# Altium PCB TIDA_010057.PcbDoc (part 7 of 9)
Units mil, origin at the board's own origin, x right, y up, seen from the top; angles counter-clockwise.
Board outline 1771.65 x 3543.31 mil, 12 copper layers (Top Layer, GND1, Signal Layer 1, GND2, POWER1, POWER2, GND4, POWER3, GND6, Signal Layer 2, GND7, Bottom Layer), stack 62.79 mil thick; 593 components, 374 nets, 1805 pads, 1029 vias.
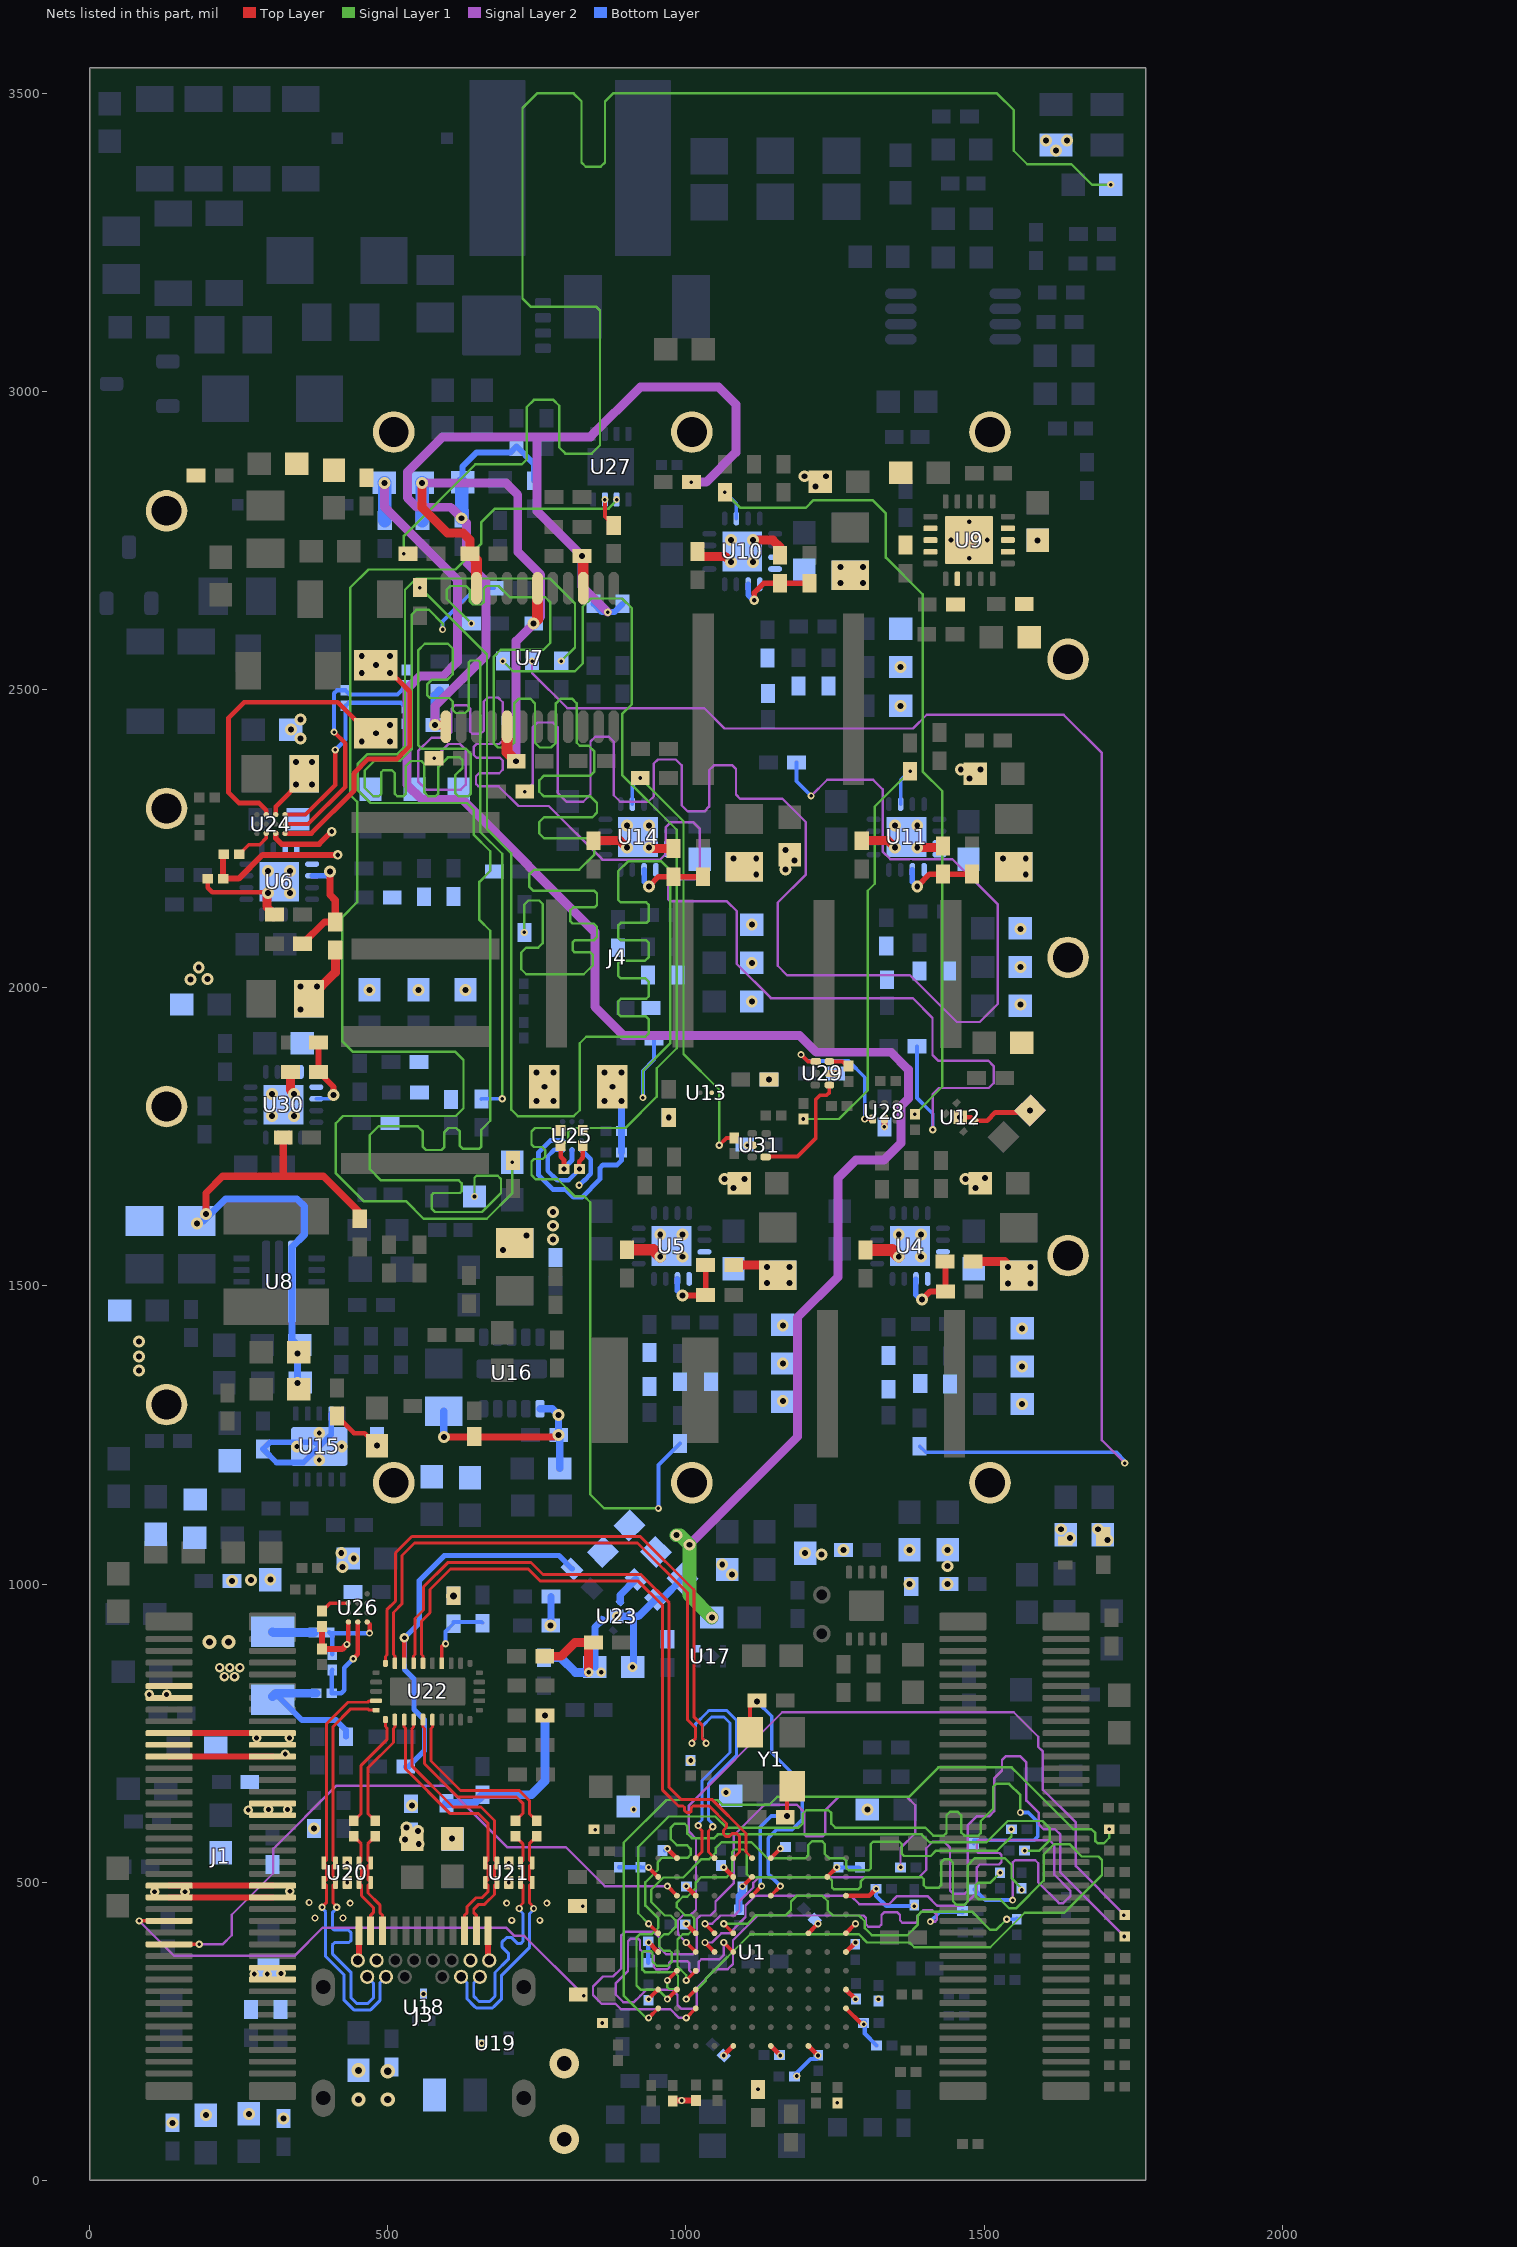
[diagram p15: the nets of this part, all layers, seen from the top]

## Via types
v1: diameter 12, hole 6, Top Layer to Bottom Layer, tented both sides, 424 vias
v2: diameter 20, hole 10, Top Layer to Bottom Layer, tented both sides, 401 vias
v3: diameter 16, hole 8, Top Layer to Bottom Layer, tented both sides, 96 vias
v4: diameter 24, hole 12, Top Layer to Bottom Layer, tented both sides, 28 vias
v5: diameter 20, hole 10, Top Layer to Bottom Layer, 28 vias
v6: diameter 40, hole 20, Top Layer to Bottom Layer, tented both sides, 23 vias
v7: diameter 19.68, hole 7.87, Top Layer to Bottom Layer, 17 vias
v8: diameter 19.68, hole 7.87, Top Layer to Bottom Layer, tented both sides, 10 vias
v9: diameter 32, hole 16, Top Layer to Bottom Layer, tented both sides, 1 vias
v10: diameter 13, hole 6, Top Layer to Bottom Layer, tented both sides, 1 vias

## Nets (pads, with @x,y where several pads share a name; then routed paths per layer and width w, separated by ;. In a path a pad name is that pad's centre, name@x,y a point inside that pad or via, vN(x,y) a via of type N, cw(c..) or ccw(c..) an arc to the next point about the centre after c; other vN are vias at no path point) (continued)
NetR220_1: R220.1 U1.J3 | length 1249.2
  Top Layer w6.25: v1(1000.5,272.5) U1.J3@1016.51,288.51
  Signal Layer 2 w4: v1(1000.5,272.5) 988.52,272.5 974.01,287 891.16,287 881.82,296.34 858.66,296.34 844.2,310.8 844.2,325.2 861,342 878,342 891.8,355.8 891.8,410.8 897.71,416.71 943.22,416.71 943.26,416.75 945.45,416.75 955.2,407 955.2,390.8 967,379 1011,379 1018,386 1018,438 1024.31,444.31 1041.31,444.31 1049.69,452.69 1049.69,467.72 1080,498.04 1080,578 1132.2,630.2 1185.8,630.2 1199,617 1199,580 1202,577 1229.15,577 1234,581.85 1234,621 1256,643 1370.82,643 1384.7,629.12 1384.7,582.19 1360.01,557.5 v1(1360.01,525)
NetR221_1: R221.1 U1.J1 | length 1288.3
  Top Layer w6.25: v1(937.5,272.5) U1.J1@953.52,288.51
  Signal Layer 1 w4: v1(937.5,272.5) 933.45,272.5 895.61,310.34 895.61,566.34 967.27,638 1053.17,638 1061.29,629.89 1139.89,629.89 1153.2,643.2 1373.95,643.2 1423.39,692.64 1546.2,692.64 1559,679.84 1649.84,589 1680.17,589 1686.8,582.37 1686.8,569.05 1690.36,565.5 1700.98,565.5 1710.01,574.53 v1(1710.01,589)
NetR222_1: R222.1 U1.H2 | length 1217.8
  Top Layer w6.25: v1(969,303.99) U1.H2@985.02,320.01
  Signal Layer 1 w4: v1(969,303.99) 952.99,320 924,320 917.16,326.84 917.16,407.16 923,413 943,413 953.8,423.8 953.8,439 932,460.8 932,499.98 953,520.98 953,534 960.3,541.3 1003.3,541.3 1008,546 1008,556 1002,562 985,562 974.8,572.2 974.8,591.8 981,598 998,598 1002.57,593.43 1002.57,581.43 1010,574 1047.5,574 1053.7,580.2 1395.3,580.2 1408.5,567 1504,567 1539.8,602.8 1598.2,602.8 1610,591 1610,570 1593,553 v1(1567.99,553)
NetR223_1: R223.1 U1.H3 | length 1221.7
  Top Layer w6.25: v1(1000.5,303.99) U1.H3@1016.51,320.01
  Signal Layer 1 w4: v1(1000.5,303.99) 1002.38,303.99 1033.6,335.21 1033.6,338.6 1107.82,412.82 1290.21,412.82 1304.01,399.02 1375.11,399.02 1383.13,391 1510.52,391 1568.32,448.8 1634.97,448.8 1640.83,454.66 1640.83,455.21 1697.82,512.2 1697.82,537.38 1692,543.2 1663.96,543.2 1643.16,564 1617.86,564 1599.93,546.07 1599.93,502.41 1553.72,456.2 1542.28,456.2 1527,471.48 1490.52,471.48 1486,476 1486,495 1490,499 1510.01,499 v1(1527,515.99)
NetR224_1: R224.1 U1.F4 | length 1226.3
  Top Layer w6.25: v1(1031.99,399.02) U1.F4@1048.01,383
  Signal Layer 2 w4: v1(1031.99,399.02) 1044.02,399.02 1049.69,404.69 ; 1049.69,404.73 1059.17,414.22 1072.7,414.22 1100,441.51 1100,461 1116.21,477.21 1276.79,477.21 1291,463 1340.49,463 1354.29,476.8 1405.12,476.8 1420.72,461.2 1421,461.2 1421.64,460.56 1465.56,460.56 1488,483 1488,525 1492.79,529.79 1525.04,529.79 1529.25,534 1529.25,545.75 1526,549 1491,549 1488,552 1488,568 1490.39,570.39 1609.61,570.39 1618,562 1618,512.52 1645,485.52 1645,477 1633,465 1625.52,465 1591,499.52 1591,532 1586,537 1552,537 1548,533 v1(1548,470)
  Bottom Layer w6.25: R224.1@1483.99,488 1501.91,470.08 1547.92,470.08 v1(1548,470)
NetR225_1: R225.1 U1.G2 | length 1212.3
  Top Layer w6.25: v1(969,335.49) U1.G2@985.02,351.5
  Signal Layer 1 w4: v1(969,335.49) 969,324 972,321 982,321 986.7,325.7 986.7,343.3 980.71,349.29 931.21,349.29 926.96,353.54 926.96,381.96 929,384 942,384 944,382 944,367 951,360 969.8,360 976.2,366.4 976.2,382 972.98,385.22 962.78,385.22 955.2,392.8 955.2,404.73 963.28,412.82 970.82,412.82 982.8,424.8 982.8,436.23 974.72,444.31 964.49,444.31 941.8,467 941.8,487.8 962,508 995.48,508 1026.28,538.8 1039.29,538.8 1050.2,549.71 1050.2,557.72 1059.68,567.2 1110,567.2 1137,540.2 1200.2,540.2 1205,545 1205,562 1212,569 1228,569 1233,564 1233,547.45 1240.25,540.2 1264.8,540.2 1269,536 1269,524 1273,520 1307,520 1310,523 1310,564 1314,568 1358,568 1362,564 1362,548 1366,544 1410.55,544 1419.55,553 1522.21,553 1546,576.79 v1(1546,589)
NetR226_1: R226.1 U1.G3 | length 1133.7
  Top Layer w6.25: v1(1000.5,335.49) U1.G3@1016.51,351.5
  Signal Layer 1 w4: v1(1000.5,335.49) 1000.5,343.97 986,358.46 986,404.04 994.78,412.82 1004,412.82 1014.3,423.11 1014.3,439.45 1009,444.75 998.24,444.75 985,457.99 985,466.03 994.78,475.81 1002.32,475.81 1016.79,490.28 1016.79,499.8 1025.7,508.7 1068.5,508.7 1077.8,518 1077.8,550.8 1082,555 1097,555 1102,550 1102,513.7 1107,508.7 1239.3,508.7 1245,503 1245,491.41 1248,488.41 1289.41,488.41 1293,492 1293,501 1300.7,508.7 1395.3,508.7 1399,505 1399,495 1403,491 1424,491 1428,495 1428,533 1433.75,538.75 1441.99,538.75 1448,532.74 1448,468 1454,462 1467,462 1473,468 1473,529 1484.3,540.3 1534.95,540.3 1546,529.25 1546,507.01 1563,490.01 v1(1563,487)
NetR227_1: R227.1 U1.F3 | length 1308.9
  Top Layer w6.25: v1(1000.5,399.02) U1.F3@1016.51,383
  Signal Layer 2 w4: v1(1000.5,399.02) 986.7,412.82 986.7,436.23 995.47,445 1008,445 1017,454 1017,573 1005,585 1005,628.54 1161.66,785.2 1549.8,785.2 1591,744 1591,727 1598.8,719.2 1598.8,655.2 1654,600 1654,526.99 1734,446.99 v1(1734,445)
NetR228_1: R228.1 U1.F5 | length 1220.8
  Top Layer w6.25: v1(1063.49,399.02) U1.F5@1079.5,383
  Signal Layer 2 w4: v1(1063.49,399.02) 1063.49,377.91 1056.38,370.8 1025.8,370.8 1021.8,366.8 1021.8,351.5 1018.05,347.75 1010.05,347.75 1005.8,352 1005.8,364.2 1002.2,367.8 974.5,367.8 972,365.3 972,357 969,354 950,354 946,358 946,376.75 939.39,383.36 927.16,383.36 923.05,387.47 923.05,402.32 919.86,405.51 907.48,405.51 903,401.03 903,351.16 882.62,330.78 882.62,311.38 895,299 913,299 923.7,309.7 934,320 977,320 986,311 986,294 992,288 1013,288 1018.19,293.19 1018.19,323.19 1049,354 1070,354 1079,363 1079,402.86 1120.45,444.31 1298,444.31 1302.13,440.19 1302.13,429 1305.71,425.42 1324.42,425.42 1328,429 1328,445 1333,450 1353.84,450 1359.04,444.8 1359.04,436.16 1363,432.2 1385.2,432.2 1388,435 1388,443 1398,453 1413,453 1421,445 1421,437 1418,434 v1(1410,434)
  Bottom Layer w6.25: v1(1410,434) 1425.86,449.86 1463.23,449.86 1464.01,449.08 R228.1@1464.01,452
NetR231_1: R231.1 U26.B1 | length 49.4
  Top Layer w6.25: R231.1@390,954.99 403.01,968 U26.B1@434,968
NetR234_2: R234.2 U29.6 | length 32.4
  Top Layer w6.25: U29.6@1240.62,1876.38 1262.62,1876.38 R234.2@1270,1869
NetR235_1: R235.1 U24.B1 | length 64.4
  Top Layer w6.25: R235.1@250.98,2224 266.98,2240 285.17,2240 296.25,2251.09 U24.B1@296.25,2259
NetR240_1: R240.1 U1.E1 | length 1227.1
  Top Layer w6.25: v1(937.5,430.51) U1.E1@953.52,414.5
  Signal Layer 1 w4: v1(937.5,430.51) 920,448.02 920,559 971.2,610.2 1049.3,610.2 1067.9,591.6 1188.81,591.6 1196,598.79 1196,615 1201.8,620.8 1239.2,620.8 1244,616 1244,598 1250.4,591.6 1401.37,591.6 1414.77,578.2 1432.37,578.2 1437.03,582.86 1437.03,612.26 1443.29,618.51 1455.57,618.51 1461.93,612.16 1461.93,583.26 1466.99,578.2 1490.2,578.2 1494.2,582.2 1494.2,602.2 1515.2,623.2 1515.2,660.2 1520,665 1542.16,665 1561,646.16 v1(1561,617)
  Bottom Layer w6.25: R240.1@1483,565.01 1483,570.39 1583.67,570.39 1590.17,576.9 1590.17,601.05 1574.22,617 v1(1561,617)
NetR243_1: R243.1 U1.E5 | length 632.4
  Top Layer w6.25: v1(1063.49,430.51) U1.E5@1079.5,414.5
  Signal Layer 1 w4: v1(1063.49,430.51) 1103.51,430.51 1117.8,444.8 1167.8,444.8 1176.21,453.21 1176.21,467.72 1185.69,477.21 1229,477.21 1238,468.21 1238,453 1246.69,444.31 1290.21,444.31 1300,434.52 1300,423 1312,411 1371.13,411 1389,428.87 1389,444.5 1395.25,450.75 1479.73,450.75 1510.38,420.1 1520.1,420.1 v1(1538,438)
  Bottom Layer w6.25: v1(1538,438) R243.1@1555,437.99 R243.1@1555,439.61
NetR244_1: R244.1 U1.E4 | length 1309.4
  Top Layer w6.25: v1(1031.99,430.51) U1.E4@1048.01,414.5
  Signal Layer 2 w4: v1(1031.99,430.51) 1043.97,430.51 1057.77,444.31 1081.31,444.31 1090,453 1090,468.47 1113.22,491.68 1113.22,499.22 1122.47,508.47 1390.96,508.47 1403,520.51 1403,557 1414,568 1433,568 1442.95,558.05 1442.95,486.05 1448,481 1468,481 1473,486 1473,596 1488,611 1509,611 1517,619 1517,674 1530.2,687.2 1530.2,705 1536.2,711 1561,711 1571,701 1571,637 1592,616 1592,597 1600,589 1619,589 1628,580 1628,516.38 v1(1735.38,409)
NetU28_4: U28.4 U29.1 | length 235.9
  Top Layer w6.25: v1(1193,1888) 1204.62,1876.38 U29.1@1217.98,1876.38 ; v1(1300,1780) U28.4@1313.31,1780
  Bottom Layer w6.25: v1(1193,1888) 1203.56,1877.44 1272.56,1877.44 1300,1850 v1(1300,1780)
NetU29_4: U29.4 U31.1 | length 202.1
  Top Layer w6.25: U31.1@1133.83,1716.31 1134.51,1717 1187,1717 1218,1748 1218,1813 1224.89,1819.89 1235.89,1819.89 1240.62,1824.62 U29.4@1240.62,1837.01
PGND: C41.2 C43.2 C44.2 C45.2 C46.2 C47.2 C48.2 C50.2 C51.2 C56.2 C57.2 C58.2 C61.2 C62.2 C63.2 C64.2 C66.2 C67.2 C68.2 C75.2 C76.2 C81.2 C82.2 C83.2 C84.2 C85.2 C86.2 C87.2 C88.2 C89.2 C90.2 C94.2 C95.1 C96.2 C97.2 C98.2 C99.2 C100.2 C101.2 C103.2 C104.2 C105.2 C106.2 C107.2 C108.2 C109.2 C110.2 C111.2 C113.2 C114.2 C117.2 C118.2 C120.2 C121.2 C122.2 C124.1 C129.2 C131.2 C132.2 C134.2 C135.2 C137.2 C155.2 C157.2 C158.2 C159.2 C160.2 C161.1 C171.2 C175.2 C178.2 C181.2 C186.2 C187.2 C189.2 C191.2 C192.1 C193.2 C194.1 C195.1 C196.2 C197.2 C198.2 C199.2 C202.1 C203.2 C207.2 C209.2 C210.2 C215.2 C216.2 C217.2 C218.2 C219.2 C220.2 C221.2 C222.2 C223.2 C224.2 C225.2 C226.2 C227.2 C228.2 C229.2 C230.2 C231.2 C244.1 D7.1 D10.2 D11.2 D12.2 D13.2 D14.2 D15.2 D16.2 GND.1 J3.A1 J3.A12 J3.B1 J3.B12 J3.M1 J3.M2 J4.SH1 J4.SH2 J4.SH3 J4.SH4 J4.SH5 J4.SH6 J4.SH7 J4.SH8 J4.SH9 J4.SH10 J4.SH11 J4.SH12 J4.SH13 L21.2 L29.2 L38.1 L39.1 L44.2 R51.1 R58.1 R60.2 R61.2 R76.1 R98.1 R100.2 R105.1 R106.2 R111.1 R115.1 R116.2 R119.2 R126.1 R131.1 R132.2 R137.2 R165.1 R190.2 U4.3 U4.4 U4.5 U4.17 U5.3 U5.4 U5.5 U5.17 U6.3 U6.4 U6.5 U6.17 U8.6@339.32,1507 U9.2 U9.3 U9.4 U9.12 U9.13 U9.14 U9.17 U9.21 U10.3 U10.4 U10.5 U10.17 U11.3 U11.4 U11.5 U11.17 U12.2 U12.5 U13.B2 U14.3 U14.4 U14.5 U14.17 U15.4 U15.11 U16.6 U18.3 U19.3 U20.3@432,532.44 U20.8@432,499.56 U21.3@703,532.44 U21.8@703,499.56 U23.2 U23.5 U24.C1 U24.C3 U30.3 U30.4 U30.5 U30.17 | length 3228.5
  Top Layer w8: C155.2@198,2183 198,2168 205.5,2160.5 v5@297.5,2160.5 ; U24.C3@312,2290.5 312,2304 360,2352 C62.2@360,2359 ; C192.1@415,1281.76 443,1253.76 443,1253 461.38,1253 v2(482,1232.38) ; v2(1460,1783) 1478.1,1783 U12.2@1483.94,1777.15 1505.15,1777.15 1518.99,1790.99 1573.99,1790.99 v2(1577.27,1794.27)
  Top Layer w9: U24.C1@312,2259 312,2251 322,2241 385,2241 v3(406,2262)
  Top Layer w10: J3.B12@449.76,368.93 451.73,370.9 J3.A1@451.73,418.54 ; J3.A12@668.27,418.54 668.27,370.9 J3.B1@670.24,368.93
  Top Layer w12: v2(195,1621) 195,1656 223,1684 324,1684 ; C160.2@324.76,1749 324.76,1684.76 324,1684 ; R165.1@453,1612.62 453,1623 392,1684 324,1684 ; v2(594,1247) 783.62,1247 v2(786.62,1250)
  Top Layer w15: v5@297.5,2160.5 297.5,2135.5 C66.2@310,2123 ; R131.1@336.76,1859 336.76,1828.24 v5(343,1822) ; C157.2@368,1982 412,2026 R76.1@412,2063.38 ; C216.2@845,2246.74 889.26,2246.74 v5(901,2235) ; v5(938,2235) 939.38,2233.62 R115.1@979,2233.62 ; C87.2@1019.5,2731.62 1019.5,2723.5 1066.01,2723.5 v5(1075.5,2714) ; R58.1@1080.24,1535 1137,1535 C57.2@1154,1518 ; v5(1112.5,2751) 1146,2751 1158,2739 R98.1@1158,2725.62 ; C106.2@1295,2246.74 1339.26,2246.74 v5(1351,2235) ; v5(1388,2235) 1428,2235 R105.1@1431,2238 ; R51.1@1481.62,1541 1534.5,1541 C43.2@1558,1517.5
  Top Layer w20: C157.2@368,1982 C157.2@373.5,1976.5 ; C94.2@901,1560.74 945.26,1560.74 v5(957,1549) ; C45.2@1301,1560.24 1345.76,1560.24 v5(1357,1549)
  Bottom Layer w9.5: C122.2@291,1226.38 302.62,1238 378.2,1238 U15.11@385.32,1230.88 ; 335,1204 358.43,1204 U15.11@385.32,1230.88 ; U15.4@405,1286 405,1250.57 U15.11@385.32,1230.88
  Bottom Layer w10: C122.2@291,1226.38 313.38,1204 335,1204
  Bottom Layer w12: C117.2@191,1609 228,1646 348,1646 360,1634 360,1586 339.32,1565.32 U8.6@339.32,1507 339.32,1410.17 348.5,1401 v2(348.5,1387) v2(348.5,1337) ; v2(594,1247) C194.1@594,1290 ; U16.6@755.24,1294.07 775.93,1294.07 v2(786.62,1283.38) v2(786.62,1250) 788.5,1248.13 R190.2@788.5,1194 ; v3(884,946) 902.1,946 ; 904.44,948.35 902.1,946 ; v3(910.5,861) 911.87,862.38 911.87,940.91 906.79,946 ; C203.2@994.27,1009.29 959.58,974.59 C202.1@949.41,974.59 920.81,946 906.79,946 ; 902.1,946 906.79,946
  other v1: 657.36,230 560,312.64 708.06,436 755.06,436 378,440 425,440 436.8,465 699.24,465 766.86,465 368,466 432,499.56 703,499.56 432,532.44 703,532.44
  other v2: 139,96.62 325,103.62 195,109.5 267,111.5 608,573 541,628.62 1564,1302 1162.5,1307 1564,1365 1162.5,1370 1564,1429 1162.5,1434 1136,1505 1174,1505 1540,1504.5 1578,1504.5 1136,1532 1174,1532 1540,1531.5 1578,1531.5 693,1560 733,1585 180,1605 971.26,1782.76 1139.26,1846 354,1964 1561,1972 1110.5,1977 469.53,1996.66 551.42,1996.66 630.53,1996.66 354,2002 381,2002 1561,2035 1110.5,2042 1561,2099 1110.5,2106 1118,2190 1570,2190 1080,2217 1118,2217 1532,2217 1570,2217 346,2341 373,2341 346,2379 373,2379 1360,2473 1360,2538 1259.01,2679 1297.01,2679 1259.01,2706 1297.01,2706 1590,2750.5
  other v4: 451,135.5 500,135.5 500,183 451,184.5
  other v5: 994,1549 1394,1549 957,1586 994,1586 1357,1586 1394,1586 306,1785 343,1785 306,1822 299,2159 336,2159 299,2196 336,2196 901,2272 938,2272 1351,2272 1388,2272 1112.5,2714 1075.5,2751
  other v7: 385.32,1208.24 347.91,1230.88 422.72,1230.88 385.32,1253.52
  other v8: 1475,2720.49 1444.49,2751 1505.51,2751 1475,2781.51
PORT: R153.1 R176.1 U22.4 | length 127.7
  Top Layer w6.25: U22.4@590.62,867.24 590.62,895.62 595,900 v1(597,900)
  Bottom Layer w6.25: v1(597,900) 597,920.38 R153.1@610,933.38 610,936.38 657.75,936.38 R176.1@658.87,935.25
RX_PG_1V2: R102.1 R108.2 U14.14 | length 750.1
  Top Layer w6.25: v1(1056,1736) 1067.98,1747.98 R102.1@1081,1747.98
  Signal Layer 1 w4: v1(923.42,2351.93) 996,2279.35 996,1889 1056,1829 v1(1056,1736)
  Bottom Layer w6.25: U14.14@910.16,2308.12 910.16,2338.67 v1(923.42,2351.93)
RX_PG_1V8: R91.2 R175.1 U10.14 | length 1413
  Signal Layer 1 w4: v1(1065.5,2831) 1091.5,2805 1201,2805 1214,2818 1313,2818 1335.5,2795.5 1335.5,2721.5 1397,2660 1397,2363 1430,2330 1430,1833.99 v1(1384,1787.99)
  Bottom Layer w6.25: v1(1065.5,2831) 1084.66,2811.83 U10.14@1084.66,2787.12
RX_PG_3V3: R62.2 R187.1 U11.14 | length 754.5
  Signal Layer 1 w4: v1(1197,1780.02) 1257.02,1780.02 1305,1828 1305,2162.91 1316.65,2174.56 1316.65,2304.03 v1(1376,2363.38)
  Bottom Layer w6.25: U11.14@1360.16,2308.12 1360.16,2347.54 v1(1376,2363.38)
SSRX1_N: J3.B10 U20.5 U20.6 U22.14 | length 705.3
  Top Layer w5: v1(390,458) 390,458.44 396.97,465.41 396.97,495.22 U20.6@392.63,499.56 396.97,503.91 396.97,528.09 U20.5@392.63,532.44 396.97,536.78 396.97,765.53 433.32,801.88 466.46,801.88 468.21,803.63 479.76,803.63 U22.14@480.39,804.25
  Bottom Layer w5: v1(390,458) 390,456.44 396,450.44 396,375.56 427,344.56 427,302 443,286 471.32,286 486.76,301.44 486.76,331.12 J3.B10@497.01,341.37
SSRX1_P: J3.B11 U20.4 U20.7 U22.15 | length 705.2
  Top Layer w5: v1@414.44,456 v1(414.44,458) 414.44,459.53 408.37,465.6 407.97,466.01 407.97,495.22 U20.7@412.32,499.56 407.97,503.91 407.97,528.09 U20.4@412.32,532.44 407.97,536.78 407.97,760.97 437.88,790.88 466.46,790.88 468.84,788.5 U22.15@480.39,788.5
  Bottom Layer w5: v1@414.44,456 414,456 407,449 407,423 410.37,419.63 434.37,419.63 438,416 438,401.83 435.17,399 411,399 407,395 407,380.11 438,349.11 438,306.56 447.56,297 466.76,297 475.76,306 475.76,331.12 J3.B11@465.51,341.37
SSRX2_N: J3.A10 U21.5 U21.6 U22.18 | length 469.1
  Top Layer w5: U22.18@527.63,772.76 527.63,760.41 530,758.04 530,690 605,615 652,615 667.97,599.03 667.97,536.78 U21.5@663.63,532.44 667.97,528.09 667.97,503.91 U21.6@663.63,499.56 667.97,495.22 667.97,483.97 658,474 648,474 633.24,459.24 633.24,449 628.9,444.66 J3.A10@628.9,418.54
SSRX2_P: J3.A11 U21.4 U21.7 U22.19 | length 469.1
  Top Layer w5: U22.19@543.38,772.76 543.38,760.41 541,758.04 541,694.55 609.56,626 656.56,626 678.97,603.58 678.97,536.78 U21.4@683.32,532.44 678.97,528.09 678.97,503.91 U21.7@683.32,499.56 678.97,495.22 678.97,479.42 664.56,465 662.56,463 652.56,463 644.24,454.68 644.24,449 648.58,444.66 J3.A11@648.58,418.54
SSRXM: U1.A3 U22.10 | length 1350.6
  Top Layer w5: U22.10@496.13,867.24 496.13,878.79 498.51,881.17 498.51,956.96 513,971.45 513,1052.56 540.44,1080 923.56,1080 1011,992.56 1014,989.56 1014,776.56 1027.44,763.12 1027.44,741.54 1033.88,735.1 v1(1033.88,733) ; U1.A3@1016.51,540.48 1026.76,550.73 1026.76,586.78 1020.64,592.9 v1(1020.64,595)
  Bottom Layer w5: v1(1020.64,595) 1020.64,597.95 1027,604.31 1027,670.56 1074,717.56 1074,767 1064,777 1043,777 1027.44,761.44 1027.44,741.54 1033.88,735.1 v1(1033.88,733)
SSRXP: U1.A4 U22.9 | length 1351.5
  Top Layer w5: U22.9@511.88,867.24 511.88,879.59 509.51,881.96 509.51,952.41 524,966.9 524,1048 545,1069 919,1069 1003,985 1003,772 1016.44,758.56 1016.44,741.54 1010,735.1 v1(1010,733) ; v1(1045,593) 1044.63,593 1037.76,586.13 1037.76,550.73 U1.A4@1048.01,540.48
  Bottom Layer w5: v1(1010,733) 1010,735.1 1016.44,741.54 1016.44,766 1035.22,784.78 1038.44,788 1068.56,788 1071.78,784.78 1085,771.56 1085,713 1038,666 1038,604.64 1045,597.64 v1(1045,593)
SSTX1_N: C125.1 J3.A3 U20.1 U20.10 | length 181
  Top Layer w5: C125.1@479,577 466.5,564.5 466.5,537.31 U20.1@471.37,532.44 467.03,528.09 467.03,503.91 U20.10@471.37,499.56 467.03,495.22 467.03,481.97 486.76,462.24 486.76,449 491.1,444.66 J3.A3@491.1,418.54
SSTX1_N_SYS: C127.2 U22.16 | length 193.7
  Top Layer w5: C127.2@443,602.98 455.5,615.48 455.5,696.06 498.51,739.06 498.51,758.83 496.13,761.21 U22.16@496.13,772.76
SSTX1_P: C127.1 J3.A2 U20.2 U20.9 | length 195
  Top Layer w5: C127.1@443,577 455.5,564.5 455.5,536.25 U20.2@451.69,532.44 456.03,528.09 456.03,503.91 U20.9@451.69,499.56 456.03,495.22 456.03,477.42 ; 466.22,467.22 456.03,477.42 ; J3.A2@471.42,418.54 471.42,444.66 475.76,449 475.76,457.68 456.03,477.42
SSTX1_P_SYS: C125.2 U22.17 | length 193.7
  Top Layer w5: C125.2@479,602.98 466.5,615.48 466.5,691.5 509.51,734.51 509.51,758.04 511.88,760.41 U22.17@511.88,772.76
SSTX2_N: C126.2 J3.B3 U21.1 U21.10 | length 421.9
  Top Layer w5: v1(744.5,456) 744.5,458.53 738.03,465 738.03,495.22 U21.10@742.37,499.56 738.03,503.91 738.03,528.09 U21.1@742.37,532.44 737.5,537.31 737.5,564.5 C126.2@750,577
  Bottom Layer w5: J3.B3@622.99,341.37 633.24,331.12 633.24,304.2 645.22,292.22 648.44,289 675.56,289 678.78,292.22 691,304.44 691,344.15 738,391.15 738,447.52 744.5,454.02 v1(744.5,456)
SSTX2_N_SYS: C128.1 U22.20 | length 302
  Top Layer w5: U22.20@559.13,772.76 559.13,760.41 561.5,758.04 561.5,698.94 617.44,643 716,643 726.5,632.5 726.5,615.48 C128.1@714,602.98
SSTX2_P: C128.2 J3.B2 U21.2 U21.9 | length 422.3
  Top Layer w5: C128.2@714,577 726.5,564.5 726.5,536.25 U21.2@722.69,532.44 727.03,528.09 727.03,503.91 U21.9@722.69,499.56 727.03,495.22 ; v1(720.5,456) 720.5,458.47 727.03,465 727.03,495.22 ; U21.9@726.5,494.69 727.03,495.22
  Bottom Layer w5: J3.B2@654.49,341.37 644.24,331.12 644.24,308.76 653,300 671,300 680,309 680,348.71 702.14,370.86 702.14,381.04 692,391.18 692,400 699,407 708,407 718,397 723,397 727,401 727,447.52 720.5,454.02 v1(720.5,456)
SSTX2_P_SYS: C126.1 U22.21 | length 302
  Top Layer w5: U22.21@574.87,772.76 574.87,760.41 572.5,758.04 572.5,703.5 622,654 720.56,654 721.56,653 737.5,637.06 737.5,615.48 C126.1@750,602.98
SSTXM: U1.A6 U22.7 | length 1108.6
  Top Layer w5: U22.7@543.38,867.24 543.38,879.59 545.75,881.96 545.75,942.31 560,956.56 560,995.56 600.44,1036 ; U1.A6@1111,540.48 1100.75,550.73 1100.75,581.8 1043.56,639 992,639 972,659 972,968.56 927.78,1012.78 924.56,1016 760.56,1016 740.18,1036.37 600.82,1036.37 ; 600.44,1036 600.82,1036.37 ; 600.44,1036 600.82,1036.37
SSTXP: U1.A5 U22.6 | length 1109.2
  Top Layer w5: U22.6@559.13,867.24 559.13,879.59 556.75,881.96 556.75,937.75 571,952 571,991 605.37,1025.37 735.63,1025.37 756,1005 920,1005 961,964 961,654.44 987.44,628 995,628 998,625 998,620 1001,617 1007,617 1009,619 1009,625 1012,628 1039,628 1068.3,598.7 1068.3,592.3 1063,587 1063,581 1067,577 1073,577 1078,582 1085,582 1089.75,577.25 1089.75,550.73 U1.A5@1079.5,540.48
SYNC_1V2_FX3: C239.1 R88.1 | length 2615
  Signal Layer 2 w4: v1(742,2548) 742,2528.26 801.06,2469.2 1030.8,2469.2 1065,2435 1381,2435 1404,2458 1633.53,2458 1697.66,2393.87 1697.66,1241.34 v1(1736,1203)
  Bottom Layer w6.25: C239.1@1392,1231.38 1402.38,1221 1722,1221 1736,1207 v1(1736,1203)
SYNC_1V2_RX: C238.1 R82.1 | length 2498.4
  Signal Layer 1 w4: v1(554,2671.24) 666.4,2558.84 666.4,2266.28 707.2,2225.48 707.2,1795.8 718.15,1784.85 812,1784.85 822,1794.85 822,1907 832.96,1917.96 931.96,1917.96 938,1924 938,1947 932.38,1952.62 890.43,1952.62 886.4,1956.64 886.4,1977.04 891,1981.64 933.64,1981.64 938,1986 938,2010 931.7,2016.3 890.43,2016.3 886.4,2020.32 886.4,2040.72 891,2045.32 931.32,2045.32 938,2052 938,2075 933.03,2079.97 890.43,2079.97 886.4,2084 886.4,2104.4 891,2109 934,2109 938,2113 938,2139 933.35,2143.65 890.43,2143.65 886.4,2147.68 886.4,2195.4 903,2212 959,2212 973.6,2197.4 973.6,1906.6 928,1861 v1(928,1816)
  Bottom Layer w6.25: v1(928,1816) 928,1861 946.62,1879.62 C238.1@946.62,1915
SYNC_1V8_FX3: C240.1 R87.1 | length 2452.9
  Signal Layer 1 w4: v1(693,2548) 710,2531 814,2531 827,2544 827,2639 841,2653 893,2653 909.2,2636.8 909.2,2475.2 893,2459 893,2357 984.8,2265.2 984.8,1898.8 951.06,1865.06 951.06,1817.56 898.5,1765 808,1765 803,1760 803,1744 799,1740 782,1740 778,1744 778,1761.25 774.25,1765 747,1765 741,1759 741,1737 745,1733 759,1733 764,1728 764,1717 760,1713 745,1713 741,1709 741,1686 748,1679 785,1679 813.2,1650.8 829.2,1650.8 839.6,1640.4 839.6,1150.4 863,1127 v1(954,1127)
  Bottom Layer w6.25: v1(954,1127) 954,1199.76 C240.1@990,1235.76
SYNC_1V8_RX: C69.1 R84.1 | length 2544.9
  Signal Layer 2 w4: v1(729.62,2329) 743.42,2342.8 743.42,2437.25 751.17,2445 777,2445 785,2437 785,2327 800,2312 828,2312 840,2324 840,2413 848,2421 871,2421 879,2413 879,2323 890,2312 937,2312 946,2321 946,2376 953,2383 983,2383 993,2373 993,2306 1003,2296 1031,2296 1039,2304 1039,2365 1047,2373 1078,2373 1084,2367 1084,2324 1091,2317 1162,2317 1201.2,2277.8 1201.2,2190.2 1154,2143 1154,2037 1169.8,2021.2 1375.8,2021.2 1454.27,1942.73 1492.73,1942.73 1523.21,1973.21 1523.21,2139.79 1447.2,2215.8 1380.05,2215.8 1379.85,2216 1375,2216 1374.8,2215.8 1343.05,2215.8 1330,2228.85 1330,2333 1314,2349 1237,2349 v1(1210,2322)
  Bottom Layer w6.25: C69.1@1185.62,2378 1185.62,2346.38 v1(1210,2322)
SYNC_3V3_RX: C237.1 R83.1 | length 2570.4
  Signal Layer 2 w4: v1(577.76,2385) 601.76,2409 621,2409 630.5,2399.5 630.5,2340.5 622.2,2332.2 564.8,2332.2 551,2346 551,2397 573.31,2419.31 597.31,2419.31 607,2429 607,2468 613,2474 633,2474 638.42,2468.58 638.42,2429.58 642,2426 656,2426 661,2431 661,2480 668,2487 685,2487 693,2479 693,2415 687,2409 649,2409 644,2404 644,2391 649,2386 688,2386 693,2381 693,2366 687,2360 653,2360 648,2355 648,2342 652,2338 686,2338 719,2305 770,2305 860,2215 957,2215 966,2224 966,2269 975,2278 1012,2278 1023,2267 1023,2190 1015,2182 976,2182 970,2176 970,2149 974,2145 1069,2145 1085.17,2128.83 1085.17,2040.17 1142.54,1982.8 1380.36,1982.8 1413.58,1949.58 1413.58,1887.42 1423,1878 1507,1878 1516,1869 1516,1840 1508,1832 1424,1832 1414,1822 v1(1414,1762)
  Bottom Layer w6.25: C237.1@1387.62,1902 1387.62,1815.34 1414,1788.96 v1(1414,1762)
SYNC_5V_TX: C243.2 R89.1 | length 2450.3
  Signal Layer 1 w4: v1(645.5,1650) 645.5,1681.5 648.8,1684.8 684.43,1684.8 690,1679.23 690,1656 658.08,1624.08 579,1624.08 574,1629.08 574,1653 577,1656 621,1656 624,1659 624,1672 619,1677 488.85,1677 469.8,1696.05 469.8,1753.2 484.6,1768 550,1768 559,1759 559,1733 564,1728 590,1728 595,1733 595,1758 602,1765 615,1765 621,1759 621,1735 626,1730 653,1730 657,1734 657,1762 672,1777 672,2095.7 653.73,2113.97 653.73,2177.78 672,2196.04 672,2229 644,2257 644,2299 633,2310 471,2310 450,2331 450,2376 466,2392 516,2392 529,2405 529,2667.74 547.7,2686.44 772.08,2686.44 814,2644.53 814,2571 v1(791,2548)
SYNC_-5V_TX: C206.2 R120.1 U27.6 | length 2308.5
  Signal Layer 1 w4: v1(709,1707.5) 709,1655.88 666,1612.88 560.12,1612.88 530.58,1642.42 459.42,1642.42 413,1688.84 413,1773 425,1785 614,1785 627,1798 627,1879 613,1893 441,1893 424,1910 424,2119 448.8,2143.8 448.8,2311.8 437.22,2323.38 437.22,2671.22 467.6,2701.6 613.6,2701.6 657,2745 657,2781 679.68,2803.68 870.45,2803.68 883.84,2817.07 v1(883.84,2818.88)
SYNC_FPGA_1V: C65.1 R86.1 | length 2516.6
  Signal Layer 1 w4: v1(592,2601) 592,2611 569,2634 548,2634 540.2,2626.2 540.2,2400.36 520.64,2380.8 478,2380.8 461.2,2364 461.2,2335.64 475.64,2321.2 485,2321.2 489,2325.2 489,2361.52 492.48,2365 507,2365 512,2360 512,2325.2 516,2321.2 526.2,2321.2 530,2325 530,2371.61 538.85,2380.46 556.35,2380.46 561,2375.81 561,2328.2 568,2321.2 580,2321.2 585,2326.2 585,2370.54 600.88,2386.42 620.79,2386.42 625.28,2381.93 625.28,2368.87 613,2356.59 613,2327 618.8,2321.2 635.2,2321.2 639,2325 639,2393 631,2401 557,2401 551,2407 551,2566 562,2577 601,2577 609,2569 609,2526 600,2517 574,2517 566,2509 566,2491 571,2486 603,2486 609,2480 609,2466 614,2461 630,2461 636,2467 636,2546 639,2549 652,2549 655.2,2545.8 655.2,2261.64 692,2224.84 v1(692,1814)
  Bottom Layer w6.25: v1(592,2601) 592,2614.41 647.74,2670.14 R86.1@678.34,2670.14 ; C65.1@657,1813.62 657.38,1814 v1(692,1814)
SYNC_FPGA_2V5: C60.1 R85.1 | length 2491.9
  Signal Layer 1 w4: v1(640.38,2611) 599,2652.38 599,2668 605,2674 631.15,2674 637.22,2667.94 637.22,2648.87 643.15,2642.93 656.89,2642.93 660.79,2646.83 660.79,2669.24 665.55,2674 686,2674 705.06,2654.94 764.06,2654.94 772.8,2646.2 772.8,2578.8 761,2567 689.6,2567 677.6,2555 677.6,2410.4 685,2403 704,2403 712,2411 712,2477 720,2485 739,2485 747,2477 747,2411 755,2403 774,2403 782,2411 782,2477 790,2485 809,2485 817,2477 817,2411 822,2406 837,2406 846,2397 846,2362 840,2356 762.01,2356 754.01,2348 754.01,2329 762.01,2321 840,2321 ; v1(729,2093) 729,2139.86 735.61,2146.47 754.01,2146.47 760,2140.49 760,2075 752.41,2067.41 732.24,2067.41 723.92,2059.09 723.92,2031.23 732.34,2022.8 828.8,2022.8 844,2038 844,2055 839,2060 813,2060 810,2063 810,2076 814,2080 846,2080 851,2085 851,2102.5 845.5,2108 810,2108 806,2112 806,2130 811,2135 847,2135 851,2139 851,2158 846,2163 743.77,2163 737.07,2169.7 737.07,2189.85 745.22,2198 821,2198 846,2223 846,2245 840,2251 762.01,2251 754.01,2259 754.01,2278 762.01,2286 843.19,2286 851.01,2293.82 851.01,2309.99 840,2321 ; 846,2315 840,2321
SYNC_HV_TX: C28.1 R160.1 | length 2595.1
  Signal Layer 1 w4: v1(527,2728) 527,2758 647,2878 725,2878 733,2886 733,2974 745,2986 778,2986 787.65,2976.35 787.65,2906.35 798,2896 842,2896 856,2910 856,3136 850,3142 740,3142 726,3156 726,3475.7 750.43,3500.13 811.74,3500.13 824.9,3486.97 824.9,3384.33 832.17,3377.06 857.04,3377.06 864.39,3384.41 864.39,3486.71 877.81,3500.13 1521.71,3500.13 1549.81,3472.03 1549.81,3403.82 1572.44,3381.2 1646.8,3381.2 1681,3347 v1(1712.5,3347)
SYNC_INPUT: R80.2 U27.7 | length 49.4
  Top Layer w6.25: v1(864.16,2818.88) 864.16,2790.46 R80.2@879,2775.62
TX_5V: C180.2 J1.57 J1.58 J1.59 J1.60 J1.61 J1.62 L28.2 | length 346.5
  Top Layer w10: J1.57@133.37,710.86 J1.58@306.6,710.86 ; J1.61@133.37,750.23 J1.62@306.6,750.23
  other v2: 238.62,1005 271,1007 303,1007.5
  other v3: 328,715 280,742 335,742
TX_-5V: C185.1 J1.67 J1.69 L34.1
  other v2: 424,1029 443,1043 422,1052
  other v3: 100,815 129,815
UART_RX: J1.29 R17.2 | length 887
  Top Layer w6.25: v1(83.27,435.27) J1.29@133.37,435.27
  Signal Layer 2 w4: v1(83.27,435.27) 141.96,376.58 343.58,376.58 391,424 698.56,424 712.56,410 729,410 v1(829,310)
UART_TX: J1.25 U1.C2 | length 1082.5
  Top Layer w6.25: J1.25@133.37,395.9 v1(183.9,395.9) ; v1(969,493.5) U1.C2@985.02,477.49
  Signal Layer 2 w4: v1(183.9,395.9) 184,395.8 223,395.8 238.38,411.18 238.38,445.38 308,515 308,556 414.09,662.09 596.91,662.09 700.16,558.84 798.66,558.84 863.99,493.5 v1(969,493.5)
VBUS: C115.1 C130.1 C131.1 C152.1 C155.1 C204.1 C205.1 C242.1 R49.2 R65.2 R90.2 R96.2 R112.2 R144.2 R146.2 R147.2 R151.2 R152.1 R153.2 R159.1 R161.1 R166.1 R168.2 R173.2 R179.1 R180.2 R184.2 R229.2 R235.2 R238.1 U1.E11 U23.4 U24.B3 U25.C3 U28.5 U29.5 U31.5 | length 2051.3
  Top Layer w7: U1.E11@1268.48,414.5 v1(1284.5,430.51)
  Top Layer w8: U24.B3@296.25,2290.5 296.25,2297.95 284,2310.2 250.2,2310.2 233,2327.4 233,2453 259,2479 416,2479 468,2427 v2(480,2427)
  Top Layer w10: R235.2@225,2224 223.98,2222.98 C155.1@223.98,2183 250,2183 290,2223 v3(416,2223) ; R173.2@837,894 R173.2@845,902 ; U29.5@1240.62,1856.69 1250.69,1856.69 v1@1251,1857 ; v1(1333,1766.76) U28.5@1333,1780
  Top Layer w15: R146.2@763.37,879.06 790.91,879.06 813.85,902 R173.2@845,902 ; v3(837,852) R173.2@837,894
  Bottom Layer w8: U25.C3@793.25,1744 773,1744 753,1724 753,1685.84 776.84,1662 798,1662 811.2,1648.8 825.8,1648.8 855.82,1678.82 855.82,1697.82 861,1703 885,1703 891.98,1709.98 C152.1@891.98,1724
  Bottom Layer w10: R166.1@306.6,811.25 316.75,811.25 356,772 413,772 430,755 R147.2@430,744
  Bottom Layer w12: v2@503.67,2442.21 v2@503.76,2442.13 ; v2(773.24,930.5) 773.62,930.88 R168.2@773.62,979.5 ; C131.1@847.5,861 847.5,927.95 U23.4@859.71,940.15 ; C152.1@891.98,1724 R184.2@891.98,1760 891.98,1810.36 v2(892.07,1810.45)
  Bottom Layer w15: R166.1@306.6,811.25 312.34,817 R229.2@380.01,817 ; R180.2@376,590.02 376.76,590.02 376.51,590.27 v2(376,590.27) ; R238.1@598.31,632.38 644.63,632.38 R90.2@659,646.76 740.76,646.76 763.62,669.62 v2(763.62,780) ; C130.1@762.27,876.62 790.26,876.62 814.87,852 v3(837,852)
  other v1: 1103,1736 1251,1856
  other v2: 1486,1664 1469,1679.5 1502,1681 863.35,1810.45 876.86,1834.12 863.35,1857.7 892.07,1857.7 1167,2198.5 1182,2213.5 1167,2231.5 1476,2351 1461,2366 1494,2366 456.42,2413.49 503.67,2413.49 503.67,2441 1217,2841 1199,2858 1235,2858
  other v3: 226,845 243,845 858,852 218,860 235,860 252,860
  other v4: 610,980
VBUS_USB: C124.2 C154.1 L20.1 R166.2 R230.2 R231.2 U26.D1 VBUS.1 | length 190.8
  Top Layer w7.5: v1(431.37,898.94) 434,901.57 U26.D1@434,936.5
  Top Layer w10: R231.2@390,929.01 C154.1@390,890.98 423.41,890.98 v1(431.37,898.94)
  Bottom Layer w15: R166.2@307,920 308,919 R230.2@376.01,919
  other v2: 552,564 529,572 551,586 531.77,591.84
  other v4: 201,903 233,903
VCC_3.3V: C133.1 L22.2 R148.1 U22.8 | length 677.9
  Top Layer w7.8: U22.8@527.63,867.24 527.63,868 527.63,909.63 v3(528,910)
  Bottom Layer w9: R148.1@530.24,694 535,694 561.66,720.66 561.66,772.39 544,790.04 544,841 528,857 v3(528,910) 553,935 553,1006 595,1048 787,1048 C133.1@809.3,1025.7
VCC_3.3V_CDCE: C174.1 C202.2 C203.1 C236.1 L22.1 L33.1 R25.2 U17.4 U23.1 | length 3010.4
  Signal Layer 1 w23: v2(984,1082) 990,1082 v2(1006,1066) 1006,981.5 v2(1043.5,944)
  Signal Layer 2 w15: v2(494.5,2847) 494.5,2806.5 617.11,2683.89 617.11,2547.46 592.65,2523 554,2523 532,2501 532,2341 557.5,2315.5 625.5,2315.5 847.5,2093.5 847.5,1968.5 896,1920 1191,1920 1219,1892 1344,1892 1373,1863 1373,1814 1361,1802 1361,1740 1332,1711 1285,1711 1255,1681 1255,1515 1187.2,1447.2 1187.2,1247.2 v2(1006,1066) 990,1082 v2(984,1082)
  Bottom Layer w12: U23.1@889.85,969.94 889.85,981.85 C202.2@916,1008
  Bottom Layer w23: v2(494.5,2847) 495.01,2846.5 C174.1@495.01,2783.93
VCC_AUX_1V8: C73.1 C74.2 J1.20 J1.22 L12.2
  other v3: 276,346 298,346 321,347
VCC_FX3_AVDD: C49.1 C142.1 L8.2 U1.A7 | length 22.6
  Top Layer w7: U1.A7@1142.5,540.48 v1(1158.51,556.5)
  other v2: 1644,1077 1629,1092
VCC_FX3_CVDDQ: C143.1 C144.1 L23.2 R8.2 R18.2 R19.2 R20.2 U1.B6 | length 64.1
  Top Layer w7: v1(1094.98,492.97) U1.B6@1111,508.98
  Bottom Layer w12: C143.1@1089,453.99 1089,477 1094.98,482.98 v1(1094.98,492.97)
  other v1: 1254,130.01 1121,152.62 848.01,588
  other v2: 1077,1016 1061,1033
  other v3: 1008,703.98
VCC_FX3_DVDD: C6.1 C7.1 C8.1 C9.1 C10.1 C11.1 C12.1 C13.1 C40.2 C138.1 C139.2 C145.1 L7.2 U1.B10 U1.C3 U1.E9 U1.F11 U1.H1 U1.J11 U1.L5 U1.L7 | length 289.1
  Top Layer w7: v1(937.5,303.99) U1.H1@953.52,320.01 ; U1.E9@1205.49,414.5 v1(1221.5,430.51) ; U1.B10@1236.98,508.98 v1(1253,525) ; U1.J11@1268.48,288.51 1294.99,262 v1(1298,262)
  Top Layer w8: v1(1000.5,493.5) U1.C3@1016.51,477.49 ; v1(1063.49,209.5) U1.L5@1079.5,225.52 ; U1.L7@1142.5,225.52 v1(1158.51,209.5) ; U1.F11@1268.48,383 v1(1284.5,399.02)
  Bottom Layer w7: v1(1253,525) 1290.01,525 C139.2@1291.01,524 ; C6.1@1296.02,266 1300,266 1300,246.11 C138.1@1319.63,226.48
  other v2: 1304.5,622 1439,1000 1439,1030 1439,1057.5
VCC_FX3_RXVDDQ: C21.2 C53.2 C140.1 L10.2 U1.A2 | length 28.1
  Top Layer w8: v1(969,556.5) U1.A2@985.02,540.48
  Bottom Layer w7: C140.1@965,553.01 968.49,556.5 v1(969,556.5)
  other v1: 912.38,622
  other v2: 1375,1000 1375,1057.5
VCC_FX3_TXVDDQ: C20.2 C52.2 C141.1 L9.2 U1.B5 | length 22.6
  Top Layer w8: v1(1063.49,525) U1.B5@1079.5,508.98
  other v2: 1707,1074 1691,1092
  other v3: 1067.25,650.59
VCC_FX3_VIO: C14.1 C15.1 C16.1 C17.1 C18.1 C19.1 C55.2 C146.1 C147.1 C148.1 C149.1 C150.1 L18.2 R15.2 R21.2 R22.2 R23.2 U1.B1 U1.C11 U1.E3 U1.F1 U1.H11 U1.L9 | length 435.2
  Top Layer w7: v1(937.5,525) U1.B1@953.52,508.98
  Top Layer w8: v1(937.5,399.02) U1.F1@953.52,383 ; v1(1000.5,430.51) U1.E3@1016.51,414.5 ; U1.L9@1205.49,225.52 v1(1221.5,209.5) ; U1.H11@1268.48,320.01 v1(1284.5,303.99) ; U1.C11@1268.48,477.49 1307.5,477.49 v1(1319.01,489)
  Top Layer w9.8: R23.2@978,133.01 978.99,134 v1(993,134) R22.2@1017,134.01
  Bottom Layer w7: C149.1@888,525.01 C15.1@924,525.01 v1(937.5,525) v1@936.51,524.01 ; C148.1@1183,175 1183,177.46 1209.3,203.76 1218.76,203.76 C18.1@1219,204 ; C18.1@1217.5,205.5 v1(1221.5,209.5) ; v1(1319.01,489) 1319.01,476.99 1336,460 v1(1383,460)
  Bottom Layer w8: C150.1@936.99,365 936.99,398.5 v1(937.5,399.02) ; v1(1319.01,489) C14.1@1319.01,492.99
  other v1: 1186,175 860.01,264 1323,304.01 827,460
  other v2: 1227.2,1049.5 1200,1052 1264.38,1057
VCC_INT_1V: C163.2 J1.33 J1.34 J1.35 J1.36 L31.1 | length 346.5
  Top Layer w9.8: J1.33@133.37,474.64 J1.34@306.6,474.64 ; J1.35@133.37,494.33 J1.36@306.6,494.33
  other v3: 109,484 160,484 336,485
VCCO_2V5: C162.2 J1.48 J1.50 L30.1
  other v3: 266,621 300,622 332,622
VDD: C165.1 C169.1 C170.1 L32.2 R68.1 R70.2 R73.1 R77.2 R78.2 R79.2 U7.3 U7.13 | length 2145.9
  Top Layer w15: v2(579.26,2440.97) 594.52,2440.97 U7.13@597.63,2437.86 ; v2(826,2724) C169.1@827.94,2722.06
  Top Layer w17.72: U7.3@827.94,2670.14 C169.1@827.94,2722.06
  Signal Layer 2 w15: v2(579.26,2440.97) 579.26,2472.26 665,2558 665,2680.98 632,2713.98 632,2779.58 v2(624,2787.58) 605.58,2806 549,2806 532.8,2822.2 532.8,2864.8 592,2924 748,2924 ; v1(869,2630) 826,2673 v2(826,2724) 750,2800 750,2922 748,2924 ; v1(1009.24,2848) 1034,2848 1084,2898 1084,2978.45 1054.45,3008 924,3008 840,2924 748,2924
  Bottom Layer w10: L32.2@624,2846.5 L32.2@624,2848 ; L32.2@625.5,2848 625.5,2874.5 649,2898 706,2898 R68.1@716,2908 745,2879 R70.2@745,2850.62 ; R77.2@845,2644 859,2630 v1(869,2630) 880,2630 R78.2@894,2644
  Bottom Layer w15: v2(579.26,2440.97) 579.26,2490.13 R79.2@587.13,2498
  Bottom Layer w23: v2(624,2787.58) L32.2@624,2846.5
VDD_FPGA: R56.2 R72.2 R128.2 R152.2 R183.2 U25.D1 | length 74.3
  Bottom Layer w8: v1(821,1669) 828.86,1676.86 829.38,1676.86 840.62,1688.11 840.62,1712.38 U25.D1@824.75,1728.25
  other v2: 1080,1664.5 1065,1679.5 1098,1679.5 749.18,1810.45 777.9,1810.45 762.68,1834.12 749.18,1857.7 777.9,1857.7 169,2014 198,2015 183,2034 353.96,2418 337.5,2433 353.96,2450
VDD_OUT: C166.1 C167.1 C168.1 C172.1 L33.2 U7.6 U7.10 U7.17 | length 1067.9
  Top Layer w15: v2(557.5,2847) 557.5,2805.5 600.12,2762.88 626.12,2762.88 637.76,2751.24 C167.1@637.76,2728
  Top Layer w17.72: C167.1@637.76,2728 648.81,2716.94 U7.10@648.81,2670.14 ; U7.17@699.99,2437.86 699.99,2395.39 v2(715.38,2380) ; v2(744.76,2611) 751.17,2617.42 U7.6@751.17,2670.14
  Signal Layer 2 w15: v2(557.5,2847) 698,2847 718,2827 718,2731 756.43,2692.57 756.43,2622.67 v2(744.76,2611) 715.38,2581.62 v2(715.38,2380)
  Bottom Layer w23: v2(557.5,2847) 558,2846.5 C172.1@558,2783.93
VFB_FPGA_1V: R129.1 R131.2 U30.6 | length 129.8
  Top Layer w10: R129.1@384,1908 R131.2@384,1859 409,1834 v2(409,1820)
  Bottom Layer w6.25: U30.6@380.12,1813.84 402.84,1813.84 v2(409,1820)
VFB_FPGA_2V5: R74.1 R76.2 U6.6 | length 190.9
  Top Layer w12: R74.1@357.24,2074 393.87,2110.62 R76.2@412,2110.62 412,2147 403,2156 v2(403,2195)
  Bottom Layer w9.4: U6.6@373.12,2187.84 395.84,2187.84 v2(403,2195)
VFB_FX3_1V2: R50.1 R51.2 U4.6 | length 135.4
  Top Layer w10: v2(1396,1477) 1410,1491 R50.1@1435.38,1491 1435.38,1540 R51.2@1434.38,1541
  Bottom Layer w9.3: U4.6@1385.84,1511.39 1385.84,1485.16 1394,1477 v2(1396,1477)
VFB_FX3_1V8: R57.1 R58.2 U5.6 | length 120.7
  Top Layer w9.3: v2(994,1484) 1032,1484 R57.1@1033,1485 R58.2@1033,1535
  Bottom Layer w9.3: U5.6@985.84,1511.88 985.84,1492.16 v2(994,1484)
VFB_RX_1V2: R114.1 R115.2 U14.6 | length 129
  Top Layer w9.3: v2(938,2170) 954.38,2186.38 R115.2@979,2186.38 R114.1@1029,2186.38
  Bottom Layer w9.3: U14.6@929.84,2197.88 929.84,2178.16 v2(938,2170)
VFB_RX_1V8: R97.1 R98.2 U10.6 | length 143.3
  Top Layer w9.3: v3(1114.5,2650) 1114.5,2662.5 1130.38,2678.38 R98.2@1158,2678.38 R97.1@1207,2678.38
  Bottom Layer w9.3: U10.6@1104.35,2676.88 1104.35,2659.16 1113.5,2650 v3(1114.5,2650)
VFB_RX_3V3: R104.1 R105.2 U11.6 | length 131.9
  Top Layer w9.3: v2(1388,2170) 1408.76,2190.76 R105.2@1431,2190.76 R104.1@1480,2190.76
  Bottom Layer w9.3: U11.6@1379.84,2197.88 1379.84,2178.16 v2(1388,2170)
VIN1+: C153.2 R230.1 U26.D3 | length 125.6
  Top Layer w7.5: U26.D3@465.5,936.5 469.42,932.58 v1(469.42,917.84)
  Bottom Layer w7.5: R230.1@401.99,919 R230.1@403.16,917.84 ; C153.2@407,881.99 407,913.99 R230.1@403.16,917.84 ; v1(469.42,917.84) R230.1@403.16,917.84
VIN1-: C153.1 R229.1 U26.D2 | length 186.4
  Top Layer w7.5: v1(442.16,874.96) 449.75,882.54 U26.D2@449.75,936.5
  Bottom Layer w7.5: C153.1@407,856.01 405.99,855 R229.1@405.99,817 422,817 427,822 427,859.79 v1(442.16,874.96)
VIN2+: C156.1 R144.1 U24.D3 | length 352.4
  Top Layer w7: U24.D3@327.75,2290.5 362.14,2290.5 412,2340.36 v1(412,2399)
  Bottom Layer w7: v1(412,2399) 429,2416 C156.1@429,2473.01 433.99,2478 522,2478 R144.1@531,2469
VIN2-: C156.2 R145.1 U24.D2 | length 423.5
  Top Layer w7: U24.D2@327.75,2274.75 366.47,2274.75 428.7,2336.98 428.7,2410.3 v1(410,2429)
  Bottom Layer w7: v1(410,2429) 410,2494 414.99,2498.99 C156.2@429,2498.99 435.79,2492.2 516.19,2492.2 R145.1@531,2507.01
VIN3+: C136.1 R151.1 U25.D3 | length 163.4
  Top Layer w7.5: v3(821.42,1696.06) 821.42,1709.42 827,1715 R151.1@827,1735.01
  Bottom Layer w7.5: U25.D3@793.25,1728.25 779.25,1728.25 768,1717 768,1693.14 784.03,1677.11 803.29,1677.11 821.42,1695.24 v3(821.42,1696.06)
VIN3-: C136.2 R183.1 U25.D2 | length 79
  Top Layer w8: R183.1@790,1735.01 790,1717 795.44,1711.56 v3(795.44,1696.06)
  Bottom Layer w8: v3(795.44,1696.06) 795.44,1697.23 809,1710.79 U25.D2@809,1728.25
VTX_5V: R54.1 R134.2 R145.2 R159.2 R181.1 U24.D1 | length 454.4
  Top Layer w8: U24.D1@327.75,2259 372,2259 443.4,2330.4 443.4,2360 467.4,2384 516,2384 537,2405 537,2497 492.83,2541.17 v2(480,2541.17)
  other v2: 83,1358 83,1382 83,1407 777,1578 777,1601 777,1624 456.42,2527.67 503.67,2527.67 456.42,2556.39 503.67,2556.39 1621,3404 1604,3421 1639,3421
XTALIN: C1.1 U1.C6 Y1.1 | length 229.3
  Top Layer w6.25: U1.C6@1111,477.49 v1(1127.02,493.5) ; v2(1169.62,611) 1169.62,652.41 Y1.1@1178.43,661.22
  Bottom Layer w6.25: v1(1127.02,493.5) 1124.55,495.97 1124.55,592.55 1143,611 v2(1169.62,611)
XTALOUT: C2.1 U1.C7 Y1.3 | length 471.3
  Top Layer w6.25: Y1.3@1107.57,751.78 1107.57,793.19 C2.1@1119.38,805 ; Y1.3@1119.38,736.03 Y1.3@1120.36,735.04 ; U1.C7@1142.5,477.49 v1(1158.51,493.5)
  Bottom Layer w6.25: v2@1119.38,804 v2(1119.38,803) 1144,778.38 1144,717 1195,666 1195,605 1178.13,588.13 1152.13,588.13 1138,574 1138,514.02 v1(1158.51,493.5)
pads on no net: J1.75 J1.76 J1.77 J1.78 J2.75 J2.76 J2.77 J2.78 J3.A8 J3.B8 Q1.9A Q1.9B Q1.9C Q1.9D U1.A11 U1.C4 U2.9@1303,964 U7.24 U8.6@339.32,1459.76 U8.6@339.32,1507 U8.6@339.32,1554.24 U8.7@317.67,1459.76 U8.7@317.67,1507 U8.7@317.67,1554.24 U8.8@296.02,1459.76 U8.8@296.02,1507 U8.8@296.02,1554.24 U8.9 U16.5 U16.8 U16.9 U16.10 U16.11@667.45,1361 U16.11@708,1361 U16.11@748.55,1361 U20.3@432,532.44 U20.8@432,499.56 U21.3@703,532.44 U21.8@703,499.56 U22. U24.A3 U24.B2 U24.C2 U25.A3 U25.B2 U25.C2 U26.A3 U26.B2 U26.C2

## Polygon pours and split planes (outlines as drawn)
HVGND on Top Layer "Top Layer-No Net" (solid, remove dead copper, pour order 2092): 1771.65,3072 1771.65,3034.65 1718,2981 1423,2981 1376,3028 1366.55,3028 46,3028 0,3074 0,3503 40.31,3543.31 1734.69,3543.31 1771.65,3506.35
VBUS on Top Layer "Top Layer-No Net" (solid, remove dead copper, pour order 1970): 838,1770 851,1783 851,1871 852,1872 903,1872 904,1871 904,1783 874,1753 818,1753 818,1770
VDD_FPGA on Top Layer "Top Layer-No Net" (solid, remove dead copper, pour order 1968): 737,1871 788,1871 789,1870 789,1778 798,1769 798,1754 748,1754 737,1765
NetC227_1 on Top Layer "Top Layer-No Net" (solid, remove dead copper, pour order 1902): 421.98,1936.02 421.98,1849.4 670.01,1849.4 670.02,1849.41 670.02,1936.02
NetC79_2 on Top Layer "Top Layer-No Net" (solid, remove dead copper, pour order 1900): 670.02,1687.98 670.02,1774.6 421.99,1774.6 421.98,1774.59 421.98,1687.98
NetC59_2 on Top Layer "Top Layer-No Net" (solid, remove dead copper, pour order 1896): 687.01,2046.87 687.01,2133.89 438.98,2133.89 438.97,2046.87
NetC61_1 on Top Layer "Top Layer-No Net" (solid, remove dead copper, pour order 1894): 438.98,2208.7 438.97,2294.7 687.01,2294.7 687.01,2208.7
NetC39_2 on Top Layer "Top Layer-No Net" (solid, remove dead copper, pour order 1886): 1219.98,1211.98 1306.6,1211.98 1306.6,1460.01 1306.59,1460.02 1219.98,1460.02
NetC80_2 on Top Layer "Top Layer-No Net" (solid, remove dead copper, pour order 1884): 1011,2340.3 1114,2340.3 1114,2627.69 1011,2627.71
NetC102_2 on Top Layer "Top Layer-No Net" (solid, remove dead copper, pour order 1882): 1213.98,1898.98 1300.6,1898.98 1300.6,2147.01 1300.59,2147.02 1213.98,2147.02
NetC176_2 on Top Layer "Top Layer-No Net" (solid, remove dead copper, pour order 1880): 764.98,1899.98 851.6,1899.98 851.6,2148.01 851.59,2148.02 764.98,2148.02
NetC217_1 on Top Layer "Bottom Layer-No Net" (solid, remove dead copper, pour order 12): 36 vertices, not listed, extent 495,357 630,532.96
PGND on Top Layer "Bottom Layer-No Net" (solid, remove dead copper, pour order 40): 529,206 533,202 533,113 530,110 428,110 424,114 424,201 429,206
NetC129_1 on Top Layer "NONET_L-01_P-001" (solid, remove dead copper, pour order 330): 380,380 740,380 750,370 750,80 740,70 375,70 365,80 365,365
HVM on Top Layer "Top Layer-No Net" (solid, remove dead copper, pour order 388): 17 vertices, not listed, extent 27,923 347,978
1V8_DVDD on Top Layer "Bottom Layer-No Net 1" (solid, remove dead copper, pour order 736): 26,632.74 30.26,637 81,637 173,637 173,608 71.5,608 60,596.5 60,551 66,545 66,505 65,504 28,504 26,506
VCC_AUX_1V8 on Top Layer "Bottom Layer-No Net 1" (solid, remove dead copper, pour order 742): 251,361 251,332 346,332 346,361
1V2_DVDD on Top Layer "Bottom Layer-No Net 1" (solid, remove dead copper, pour order 744): 173,362 70,362 70,332 173,332
1.8V_AVDD_VCA on Top Layer "Bottom Layer-No Net 1" (solid, remove dead copper, pour order 746): 1425,755 1677,755 1677,726 1425,726
1.8V_AVDD on Top Layer "Bottom Layer-No Net 1" (solid, remove dead copper, pour order 748): 1677,696 1677,648 1676,647 1425,647 1425,696
HVP on Top Layer "Bottom Layer-No Net 1" (solid, remove dead copper, pour order 750): 1425,952 1425,922 1677,922 1677,952
VCC_INT_1V on Top Layer "Bottom Layer-No Net 1" (solid, remove dead copper, pour order 1406): 176.24,499 264.65,499 346,499 346,471 268,471 267,470 174,470 172.77,471 94.77,471 93.77,470 92,470 92,499
PGND on Top Layer "Top Layer-No Net" (solid, remove dead copper, pour order 1856): 1589,2140 1593,2136 1593,2030 1603,2020 1603,1794 1576,1767 1551,1792 1551,1814 1565,1828 1565,1884 1560,1889 1543,1889 1543,2137 1546,2140
NetC117_1 on Top Layer "Top Layer-No Net" (solid, remove dead copper, pour order 1946): 401,1496 237,1496 222,1511 222,1551 219,1554 171,1554 167,1550 167,1485 217,1435 401,1435
GND_A7 on Top Layer "Top Layer-No Net" (solid, remove dead copper, pour order 1950): 471,1582 419,1582 407,1570 407,1553 412,1548 485,1548 490,1553 565,1553 565,1593 541,1617 506,1617
PGND on Top Layer "Top Layer-No Net" (solid, remove dead copper, pour order 1952): 260,1682 255,1677 225,1677 206,1658 206,1648 206,1599 200,1593 169,1593 167,1595 167,1671 188,1692 256,1692 260,1688
PGND on Top Layer "Top Layer-No Net" (solid, remove dead copper, pour order 1954): 658,1228 590,1228 584,1234 584,1256 587,1259 763,1259 773.94,1269.94 773.94,1285.94 782,1294 792,1294 797,1289 797,1237 788,1228